# Altium PCB pcb.PcbDoc
Units mm, origin at the board's own origin, x right, y up, seen from the top; angles counter-clockwise.
Board outline 141 x 95 mm, 2 copper layers (Top Layer, Bottom Layer), stack 1.571 mm thick; 95 components, 65 nets, 236 pads, 0 vias.
Unrouted connection lines stored in the file: 165.
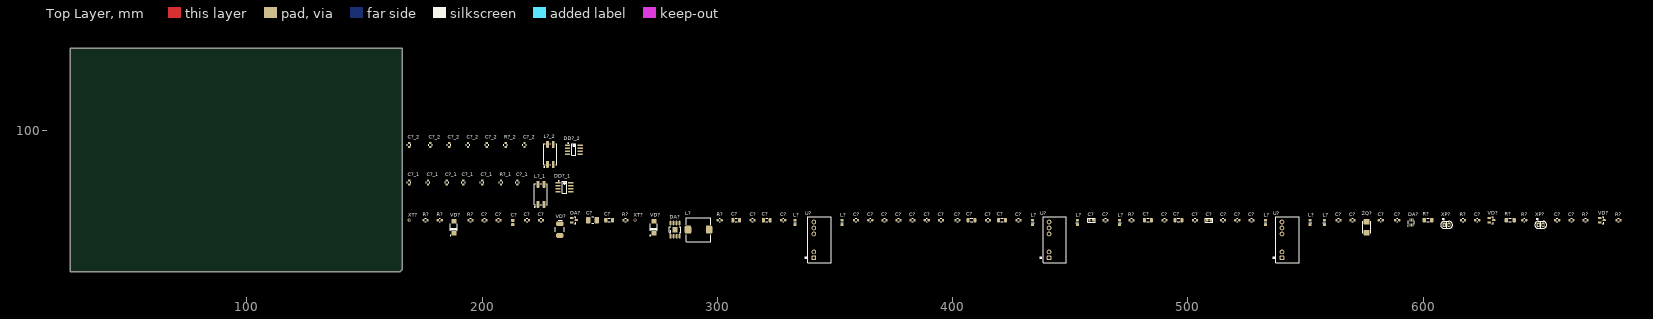
[diagram p0: Top Layer view]
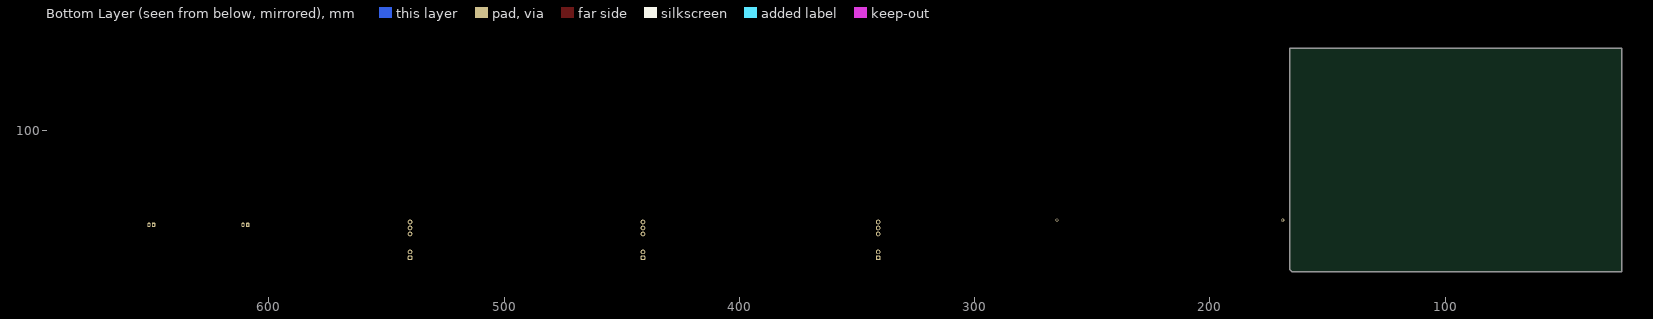
[diagram p1: Bottom Layer view, seen from below]

## Layer stack, top to bottom
Top Solder: solder mask 0.0102, Solder Resist, Dk 3.5
Top Layer: signal copper 0.0356
Dielectric1: core 1.5, FR-4, Dk 4.8
Bottom Layer: signal copper 0.0356
Bottom Solder: solder mask 0.0102, Solder Resist, Dk 3.5

## Board outline
25,135 25,40 165,40 166,41 166,135

## Design rules (kind name [scope] priority, off if disabled: settings)
Clearance [All] p1: gap=0.3 ignorepadtopadclearanceinfootprint=FALSE
ComponentClearance [All] p1: gap=-0.5 collisioncheckmode=3 verticalgap=-0.5 showdistances=FALSE
HoleSize [All] p1: absolutevalues=TRUE maxlimit=5 minlimit=0.025 maxpercent=80.000 minpercent=20.000
HoleToHoleClearance [All] p1: gap=0.3 allowstackedmicrovias=TRUE
PolygonConnect [All] p1: connectstyle=Relief reliefconductorwidth=0.3 reliefentries=4 polygonreliefangle="90 Angle" airgapwidth=0.3
RoomDefinition List1 [InComponentClass('List1')] p1: confinementstyle=ConfineIn formatcopy=TRUE lockcomponents=FALSE outline 168,43 686,43 686,67 168,67
RoomDefinition 2 [InComponentClass('2')] p2: confinementstyle=ConfineIn formatcopy=TRUE lockcomponents=FALSE outline 167,84 244,84 244,99 167,99
RoomDefinition 1 [InComponentClass('1')] p3: confinementstyle=ConfineIn formatcopy=TRUE lockcomponents=FALSE outline 167,67 240,67 240,83 167,83
RoutingCorners [All] p1: cornerstyle=45-Degree minsetback=2.5 maxsetback=2.5
RoutingVias [All] p1: holewidth=0.5 width=1 viastyle="Through Hole" minholewidth=0.5 minwidth=1 maxholewidth=0.8 maxwidth=1.3
SilkToSolderMaskClearance SilkscreenOverComponentPads [IsPad] p1: minsilkscreentomaskgap=0.254 clearancetoexposedcopper=TRUE
SolderMaskExpansion [All] p1: expansion=0.102
Width [All] p1: maxlimit=1 minlimit=0.3 preferedwidth=0.5
25 further rules are at their usual default settings.

## Classes and differential pairs
channel class List2: 1 2
component class List1: C? DA? DD? L? R? U? VD? XP? XT? ZQ?
component class 2: C?_2 DD?_2 L?_2 R?_2 VD?_2
component class 1: C?_1 DD?_1 L?_1 R?_1

## Components (designator, comment, footprint, x,y, rotation, side; value= is the part's Value field where it differs from the comment)
C? "20" CAPC1608N_SL 582,62 r0 top
C? "20" CAPC1608N_SL 570,62 r0 top
C? "0,1мк" CAPC1608N_SL 564,62 r0 top
C? "0,1мк" CAPC1608N_SL 521,62 r0 top
C? "1мк" CAPC1608N_SL 527,62 r0 top
C? "4,7мк" CAPC1608N_SL 402,62 r0 top
C? "0,1мк" CAPC1608N_SL 359,62 r0 top
C? "0,1мк" CAPC1608N_SL 365,62 r0 top
C? "0,1мк" CAPC1608N_SL 371,62 r0 top
C? "0,1мк" CAPC1608N_SL 377,62 r0 top
C? "0,1мк" CAPC1608N_SL 383,62 r0 top
C? "0,1мк" CAPC1608N_SL 389,62 r0 top
C? "0,1мк" CAPC1608N_SL 395,62 r0 top
C? "2,2мк" CAPC1608N 509,62 r0 top
C? "2,2мк" CAPC1608N 459,62 r0 top
C? "0,1мк" CAPC1608N_SL 465,62 r0 top
C? "0,1мк" CAPC1608N_SL 515,62 r0 top
C? "2,2мк" CAPC3216N 254,62 r0 top
C? "0,01мк" CAPC1608N_SL 207,62 r0 top
C? "68" CAPC1608N_SL 201,62 r0 top
C? "47мк" CAPC3225N 247,62 r0 top
C? "2,2мк" CAPC3216N 308,62 r0 top
C? "2,2мк" CAPC3216N 321,62 r0 top
C? "0,1мк" CAPC1608N_SL 315,62 r0 top
C? "0,1мк" CAPC1608N_SL 328,62 r0 top
C? "2,2мк" CAPC3216N 408,62 r0 top
C? "2,2мк" CAPC3216N 421,62 r0 top
C? "0,1мк" CAPC1608N_SL 415,62 r0 top
C? "0,1мк" CAPC1608N_SL 428,62 r0 top
C? "2,2мк" CAPC3216N 483,62 r0 top
C? "2,2мк" CAPC3216N 496,62 r0 top
C? "0,1мк" CAPC1608N_SL 490,62 r0 top
C? "0,1мк" CAPC1608N_SL 503,62 r0 top
C? "0,1мк" CAPC1608N_SL 663,62 r0 top
C? "0,1мк" CAPC1608N_SL 657,62 r0 top
C? "0,1мк" CAPC1608N_SL 623,62 r0 top
C? "0,1мк" CAPC1608N_SL 589,62 r0 top
C? "0,1мк" CAPC1608N_sl 225,62 r0 top
C? "0,1мк" CAPC1608N_sl 219,62 r0 top
C? "10мк" CAPC2012N 213,61 r90 top
C?_1 "0,1мк" CAPC1608N_SL 169,78 r90 top (schematic designator C?)
C?_1 "1000" CAPC1608N_SL 177,78 r90 top (schematic designator C?)
C?_1 "1000" CAPC1608N_SL 185,78 r90 top (schematic designator C?)
C?_1 "1000" CAPC1608N_SL 192,78 r90 top (schematic designator C?)
C?_1 "1000" CAPC1608N_SL 200,78 r90 top (schematic designator C?)
C?_1 "0,1мк" CAPC1608N_SL 215,78 r90 top (schematic designator C?)
C?_2 "0,1мк" CAPC1608N_SL 169,94 r90 top (schematic designator C?)
C?_2 "1000" CAPC1608N_SL 178,94 r90 top (schematic designator C?)
C?_2 "1000" CAPC1608N_SL 186,94 r90 top (schematic designator C?)
C?_2 "1000" CAPC1608N_SL 194,94 r90 top (schematic designator C?)
C?_2 "1000" CAPC1608N_SL 202,94 r90 top (schematic designator C?)
C?_2 "0,1мк" CAPC1608N_SL 218,94 r90 top (schematic designator C?)
DA? "L5973ADTR" SOIC8(with_termopad) 282,58 r0 top
DA? "DRTR5V0U4S" SOT363 595,61 r0 top
DA? "MCP1754ST-3302E/CB" SOT23-3N 239,62 r0 top
DD?_1 "ATA6560-GAQW-N" SOIC-8N 235,76 r0 top (schematic designator DD?)
DD?_2 "ATA6560-GAQW-N" SOIC-8N 239,92 r0 top (schematic designator DD?)
L? "220" L2012N 558,61 r90 top
L? "220" L2012N 471,61 r90 top
L? "68мк" CDRH104R 292,58 r0 top
L? "220" L2012N 333,61 r90 top
L? "220" L2012N 353,61 r90 top
L? "220" L2012N 434,61 r90 top
L? "220" L2012N 453,61 r90 top
L? "220" L2012N 533,61 r90 top
L? "220" L2012N 552,61 r90 top
L?_1 "Value" DR331 225,73 r90 top (schematic designator L?)
L?_2 "Value" DR331 229,90 r90 top (schematic designator L?)
R? "10к" RESC1608N_SL 476,62 r0 top
R? "8,2к" RESC1608N_SL 182,62 r0 top
R? "2,2к  1%" RESC1608N_SL 195,62 r0 top value=2,2к
R? "6,8к  1%" RESC1608N_SL 261,62 r0 top value=6,8к
R? "0" RESC1608N_SL 301,62 r0 top
R? "0" RESC1608N_SL 176,62 r0 top
R? "10" RESC1608N_SL 683,62 r0 top
R? "10" RESC1608N_SL 669,62 r0 top
R? "10" RESC1608N_SL 643,62 r0 top
R? "10" RESC1608N_SL 617,62 r0 top
R? "120" RESC3216N 637,62 r0 top
R? "120" RESC3216N 602,62 r0 top
R?_1 "10к" RESC1608N_SL 208,78 r90 top (schematic designator R?)
R?_2 "10к" RESC1608N_SL 210,94 r90 top (schematic designator R?)
U? "MEJ1S1205SC" MEJ1S1205SC 341,46 r90 top
U? "MEJ1S1205SC" MEJ1S1205SC 441,46 r90 top
U? "MEJ1S1205SC" MEJ1S1205SC 540,46 r90 top
VD? "SMBJ30A-TR" DO-214AA(SMB) 233,58 r90 top
VD? "SM712.TCT" SOT23-3N 676,62 r0 top
VD? "SM712.TCT" SOT23-3N 629,62 r0 top
VD? "PMEG4030EP" SOD128 188,59 r90 top
VD? "PMEG4030EP" SOD128 273,59 r90 top
XP? "PLS2-2" PLS2-2 650,60 r0 top
XP? "PLS2-2" PLS2-2 610,60 r0 top
XT? "PAD" Pad_1.3X0.8 265,62 r90 top value=PAD1.3x0.8
XT? "PAD" Pad_1.3X0.8 169,62 r90 top value=PAD1.3x0.8
ZQ? "ABM3-8.000MHZ-D2Y-T" ABM3 576,59 r90 top

## Footprints (in the part's own frame and the unit in brackets; to place one, negate y for a bottom-side part, rotate by r counter-clockwise, add the part's x,y. Pads: shape width x height; smd on the part's side, far side on the other; paste and mask are expansions set on the pad)
ABM3 [mm] "MINIATURE CERAMIC SMD CRYSTAL 5x3.2 mm"
  rrect30% 2.5x2.5 smd: 1(-2.35,0) 2(2.35,0)
  silkscreen extent -2.5,-1.75 2.5,1.75, body extent -4.25,-2.25 4.25,2.25, height 1.3
CAPC1608N [mm] "Chip Capacitor, Body 1.6x0.8mm, IPC Medium Density"
  rrect50% 1x1 smd: 1(-0.8,0) 2(0.8,0)
  silkscreen extent -1.65,-0.85 1.65,0.85, body extent -0.8,-0.41 0.8,0.41, height 0.53
CAPC1608N_SL [mm] "Chip Resistor, Body 1.6x0.8mm, IPC Medium Density"
  rrect50% 0.9x1 smd: 1(-0.85,0) 2(0.85,0)
  silkscreen extent -0.3,-0.75 0.3,0.75, body extent -0.8,-0.4 0.8,0.4, height 0.48
CAPC1608N_sl [mm] "Chip Resistor, Body 1.6x0.8mm, IPC Medium Density"
  rrect50% 0.9x1 smd: 1(-0.85,0) 2(0.85,0)
  silkscreen extent -0.3,-0.75 0.3,0.75, body extent -0.8,-0.4 0.8,0.4, height 0.48
CAPC2012N [mm] "Chip Capacitor, Body 2.0x1.3mm, IPC Medium Density"
  rrect50% 1.25x1.5 smd: 1(-0.925,0) 2(0.925,0)
  body extent -1,-0.6 1,0.6, height 0.43
CAPC3216N [mm] "Chip Capasitor, 2-Leads, Body 3,2x1,6mm, IPC Medium Density"
  rrect50% 1.3x1.8 smd: 1(-1.45,0) 2(1.45,0)
  silkscreen extent -0.51,-0.76 0.51,0.76, body extent -1.6,-0.8 1.6,0.8, height 0.53
CAPC3225N [mm] "Chip Capacitor, Body 3.2x2.5mm, IPC Medium Density"
  rrect50% 2x2.7 smd: 1(-1.9,0) 2(1.75,0)
  silkscreen extent -0.5,-1.4 0.4,1.4, body extent -1.6,-1.25 1.6,1.25, height 1.3
CDRH104R [mm]
  rrect50% 2.8x3.5 smd: 1(-4.5,0) 2(4.5,0)
  silkscreen extent -5.25,-5.13 5.25,5.13, body extent -5.25,-5.15 5.25,5.15, height 4
DO-214AA(SMB) [mm]
  rrect50% 2x3 smd: 1(2.5,0) 2(-2.5,0)
  silkscreen extent -1,-1.85 4,1.85, body extent -2.65,-1.85 2.65,1.85, height 2.3
DR331 [mm]
  rrect50% 3x1.2 smd: 1(-4.25,1.25) 2(-4.25,-1.25) 3(4.25,-1.25) 4(4.25,1.25)
  silkscreen extent -5.75,-2.75 4.5,3, body extent -4.5,-2.7 4.5,2.7, height 5.01
L2012N [mm] "Chip Ferrite Bead SMD0805, Body 2.0x1.3mm, IPC Medium Density"
  rrect40% 1x1.25 smd: 1(-1,0)
  rrect50% 1x1.25 smd: 2(1,0)
  silkscreen extent 0,-0.6 0,0.6, body extent -1,-0.6 1,0.6, height 0.43
MEJ1S1205SC [mm]
  rrect50% 2x2 hole 1.2: 1(0,0)
  round 2 hole 1.2 unplated: 2(2.54,0) 5(10.16,0) 6(12.7,0) 7(15.24,0)
  silkscreen extent -2.13,-7.33 17.37,4, body extent -2.13,-7.28 17.37,2.54, height 12.51
Pad_1.3X0.8 [mm]
  round 1.3 hole 0.8: 1(0,0)
PLS2-2 [mm]
  rrect50% 1.4x2 hole 0.8: 1(-1,0)
  oval 1.4x2 hole 0.8: 2(1,0)
  silkscreen extent -2.5,-1.5 2.5,3, body extent -2,-1 2,1, height 6
RESC1608N_SL [mm] "Chip Resistor, Body 1.6x0.8mm, IPC Medium Density"
  rrect50% 0.9x1 smd: 1(-0.85,0) 2(0.85,0)
  silkscreen extent -0.3,-0.75 0.3,0.75, body extent -0.8,-0.4 0.8,0.4, height 0.48
RESC3216N [mm] "Chip Resistor, 2-Leads, Body 3,2x1,6mm, IPC Medium Density"
  rrect50% 1.5x1.8 smd: 1(-1.6,0) 2(1.7,0)
  Top Layer pour cut-out: -0.6,0.9 -0.6,-0.9 0.6,-0.9 0.6,0.9
  silkscreen extent -0.51,-0.76 0.51,0.76, body extent -1.6,-0.8 1.6,0.8, height 0.53
SOD128 [mm] "SODFL, 2-Leads, Body 2,50x4,70mm, IPC Low Density"
  rrect30% 2x2.2 smd: 1(-2.5,0) 2(2.5,0)
  silkscreen extent -3.65,-1.5 1.5,1.65, body extent -2.85,-1.25 2.35,1.45, height 1.1
SOIC8(with_termopad) [mm]
  rect 0.7x2 smd: 1(-1.905,-2.8)
  oval 0.7x2 smd: 2(-0.635,-2.8) 3(0.635,-2.8) 4(1.905,-2.8) 5(1.905,2.8) 6(0.635,2.8) 7(-0.635,2.8) 8(-1.905,2.8)
  rect 2.3x2.3 smd: 7(0,0)
  silkscreen extent -2.5,-1.25 2.5,1.25, body extent -2.45,-3 2.45,3, height 1.75
SOIC-8N [mm] "SOIC, 8-Leads, Body 4.9x3.9mm, Pitch 1.27mm, IPC Medium Density"
  rrect50% 2.2x0.6 smd: 1(-2.7,1.905) 2(-2.7,0.635) 3(-2.7,-0.635) 4(-2.7,-1.905) 5(2.7,-1.905) 6(2.7,-0.635) 7(2.7,0.635) 8(2.7,1.905)
  silkscreen extent -2.52,-2.5 0.9,2.88, body extent -3,-2.54 3,2.54, height 1.75
SOT23-3N [mm] "SOT23, 3-Leads, Body 2.9x1.3mm, Pitch 0.95mm, Lead Span 2.5mm, IPC Medium Density"
  rrect50% 1.5x0.8 smd: 1(-0.875,0.95) 2(-0.875,-0.95) 3(1,0)
  rrect50% 1.3x0.8 on Mech16: p(-0.875,-0.95) p(-0.875,0.95) p(1,0)
  silkscreen extent 0.2,-1.5 0.75,1.5, body extent -1.2,-1.5 1.3,1.5, height 1.12
SOT363 [mm] "SOT-353/SC-88A; 5 Leads; Body 2.2 x 2.2 mm, inc. leads (LxW max)"
  rrect50% 0.35x1.35 smd: 1(-0.65,-1.075) 2(0,-1.075) 3(0.65,-1.075) 4(0.65,1.075) 5(0,1.075) 6(-0.65,1.075)
  silkscreen extent -1.55,-1.55 1.23,0.7, body extent -1.07,-1.1 1.08,1.1, height 1.05

## Part data
C? C?: library part CC0603JRNPO9BN200_Yageo, "CAP CER 20PF 50V 5% NPO 0603", Manufacturer=Yageo, ManufacturerPartNumber=CC0603JRNPO9BN200, Operating Temperature="-55°C ~ +125°C", Tolerance="± 5 %", ValueBOM="Конденсатор CC0603JRNPO9BN200 \"Yageo\" (20 пФ ± 10 %, 50 В,NP0, SMD 0603)", Voltage="50 В", ComponentLink2Description="Manufacturer Link", ComponentLink2URL=http://www.yageo.com/, ComponentLink3Description=Datasheet, ComponentLink3URL=http://www.yageo.com/documents/recent/UPY-GPHC_X7R_6.3V-to-50V-v12.pdf, Modify=12.08.2015, PartNumber=CC0603JRNPO9BN200_Yageo, Sorting=20, Supplier=Digi-Key, Supplier P/N=311-1424-1-ND, TKE=NP0, Автор="Хоменко С.П.", Количество1=10, Количество2=25, Разрешен к применению=True, Цена1=0,031, Цена2=0,0216
C? C? C? C? C? C? C? C? C? C? C? C? C? C? C? C? C? C? C? C? C? C?_1 C?_2: library part CC0603KRX7R0BB104_Yageo, "0.1µF ±10% 100V Ceramic Capacitor X7R 0603 (1608 Metric)", Manufacturer=Yageo, ManufacturerPartNumber=CC0603KRX7R0BB104, Operating Temperature="-55°C ~ +125°C", Tolerance="± 10 %", ValueBOM="Конденсатор CC0603KRX7R0BB104 \"Yageo\" (0,1 мкФ ± 10 %, 100 В, X7R, SMD 0603)", Voltage="100 В", ComponentLink2Description="Manufacturer Link", ComponentLink2URL=http://www.yageo.com/, ComponentLink3Description=Datasheet, ComponentLink3URL=http://www.yageo.com/documents/recent/UPY-NP0X7R_MV_100-to-630V_18.pdf, Modify="27.02.2017 8:51:43", PartNumber=CC0603KRX7R0BB104_Yageo, Sorting=100000, Supplier=Digi-Key, Supplier P/N=311-1523-1-ND, TKE=X7R, Автор="Ткаченко М.", Количество1=1, Количество2=10, Разрешен к применению=True, Цена1=0,21, Цена2=0,14
C?: library part CC0603KRX7R7BB105_Yageo, "CAP CER 1UF 16V 10% X7R 0603", Manufacturer=Yageo, ManufacturerPartNumber=CC0603KRX7R7BB105, Operating Temperature="-55°C ~ +125°C", Tolerance="± 10 %", ValueBOM="Конденсатор CC0603KRX7R7BB105 \"Yageo\" (1 мкФ ± 10 %, 16 В,X7R, SMD 0603)", Voltage="16 В", ComponentLink2Description="Manufacturer Link", ComponentLink2URL=http://www.yageo.com/, ComponentLink3Description=Datasheet, ComponentLink3URL=http://www.yageo.com/documents/recent/UPY-GPHC_X7R_6.3V-to-50V-v12.pdf, Modify="12.08.2015 16:30:29", PartNumber=CC0603KRX7R7BB105_Yageo, Sorting=1000000, Supplier=Digi-Key, Supplier P/N=311-1446-1-ND, TKE=X7R, Автор="Хоменко С.П.", Количество1=10, Количество2=25, Разрешен к применению=True, Цена1=0,44, Цена2=0,031
C?: library part CC0603KRX5R6BB475_Yageo, "CAP CER 4.7UF 10V 10% X5R 0603", Manufacturer=Yageo, ManufacturerPartNumber=CC0603KRX5R6BB475, Operating Temperature="-55°C ~ +125°C", Tolerance="± 10 %", ValueBOM="Конденсатор CC0603KRX5R6BB475 \"Yageo\" (4,7 мкФ ± 10 %, 10 В, X5R, SMD 0603)", Voltage="10 В", ComponentLink2Description="Manufacturer Link", ComponentLink2URL=http://www.yageo.com/, ComponentLink3Description=Datasheet, ComponentLink3URL=http://www.yageo.com/documents/recent/UPY-GPHC_X5R_4V-to-50V_19.pdf, Modify="12.08.2015 16:02:03", PartNumber=CC0603KRX5R6BB475_Yageo, Sorting=4700000, Supplier=Digi-Key, Supplier P/N=311-1455-1-ND, TKE=X5R, Автор="Хоменко С.П.", Количество1=1, Количество2=10, Разрешен к применению=False, Цена1=0,14, Цена2=0,095
C? C?: library part "GRM188R71A225KE15D_Murata Electronics", "CAP CER 2.2UF 10V X7R 0603", Manufacturer="Murata Electronics", ManufacturerPartNumber=GRM188R71A225KE15D, Operating Temperature="-55°C ~ +125°C", Tolerance="± 10 %", ValueBOM="Конденсатор GRM188R71A225KE15D \"Murata Electronics\" (2,2 мкФ ± 10 %, 10 В, X7R, SMD 0603)", Voltage="10 В", ComponentLink2Description="Manufacturer Link", ComponentLink2URL=http://www.murata.com/, ComponentLink3Description=Datasheet, ComponentLink3URL=http://www.murata.com/~/media/webrenewal/support/library/catalog/products/capacitor/mlcc/c02e.pdf, Modify="29.03.2016 8:54:49", PartNumber="GRM188R71A225KE15D_Murata Electronics", Sorting=2200000, Supplier=Digi-Key, Supplier P/N=490-4520-1-ND, TKE=X7R, Автор="Хоменко С.П.", Количество1=1, Количество2=10, Разрешен к применению=False, Цена1=0,34, Цена2=0,28
C? C? C? C? C? C? C?: library part CC1206KKX7R9BB225_Yageo, "CAP CER 2.2UF 50V 10% X7R 1206", Manufacturer=Yageo, ManufacturerPartNumber=CC1206KKX7R9BB225, Operating Temperature="-55°C ~ +125°C", Package Description="Chip Capasitor, 2-Leads, Body 3,2x1,6mm, IPC Medium Density", Tolerance="± 10 %", ValueBOM="Конденсатор CC1206KKX7R9BB225 \"Yageo\" (2,2 мкФ ± 10 %, 50 В, X7R, SMD 1206)", Voltage="50 В", ComponentLink2Description="Manufacturer Link", ComponentLink2URL=http://www.yageo.com/, ComponentLink3Description=Datasheet, ComponentLink3URL=http://www.yageo.com/documents/recent/UPY-GPHC_X7R_6.3V-to-50V-v12.pdf, Modify=13.08.2015, PartNumber=CC1206KKX7R9BB225_Yageo, Sorting=2200000, Supplier=Digi-Key, Supplier P/N=311-1964-1-ND, TKE=X7R, Автор="Хоменко С.П.", Количество1=10, Количество2=25, Разрешен к применению=True, Цена1=0,292, Цена2=0,201
C?: library part CC0603KPX7R9BB103_Yageo, "CAP CER 10000PF 50V 10% X7R 0603", Manufacturer=Yageo, ManufacturerPartNumber=CC0603KPX7R9BB103, Operating Temperature="-55°C ~ +125°C", Tolerance="± 10 %", ValueBOM="Конденсатор CC0603KPX7R9BB103 \"Yageo\" (0,01 мкФ ± 10 %, 50 В,X7R, SMD 0603)", Voltage="50 В", ComponentLink2Description="Manufacturer Link", ComponentLink2URL=http://www.yageo.com/, ComponentLink3Description=Datasheet, ComponentLink3URL=http://www.yageo.com/documents/recent/UPY-GPHC_X7R_6.3V-to-50V-v12.pdf, Modify=06.07.2015, PartNumber=CC0603KPX7R9BB103_Yageo, Sorting=10000, Supplier=Digi-Key, Supplier P/N=311-1572-1-ND, TKE=X7R, Автор="Хоменко С.П.", Количество1=10, Количество2=100, Разрешен к применению=True, Цена1=0,019, Цена2=0,0089
C?: library part CC0603JRNPO9BN680_Yageo, "CAP CER 68PF 50V NPO 0603", Manufacturer=Yageo, ManufacturerPartNumber=CC0603JRNPO9BN680, Operating Temperature="-55°C ~ +125°C", Tolerance="± 5 %", ValueBOM="Конденсатор CC0603JRNPO9BN680 \"Yageo\" (68 пФ ± 5 %, 50 В, NP0, SMD 0603)", Voltage="50 В", ComponentLink2Description="Manufacturer Link", ComponentLink2URL=http://www.yageo.com/, ComponentLink3Description=Datasheet, ComponentLink3URL=http://www.yageo.com/documents/recent/UPY-GP_NP0_16V-to-50V_10.pdf, Modify=22.01.2016, PartNumber=CC0603JRNPO9BN680_Yageo, Sorting=68, Supplier=Digi-Key, TKE=NP0, Автор="Хоменко С.П.", Количество1=10, Количество2=25, Разрешен к применению=True, Цена1=0,029, Цена2=0,0204
C?: library part "GRM32ER71A476KE15L_Murata Electronics", "47µF ±10% 10V Ceramic Capacitor X7R 1210 (3225 Metric)", Manufacturer="Murata Electronics", ManufacturerPartNumber=GRM32ER71A476KE15L, Operating Temperature="-55°C ~ +125°C", Package Description="Конденсатор керамический тип-размер 1210(3225)", Tolerance="± 20 %", ValueBOM="Конденсатор GRM32ER71A476KE15L \"Murata Electronics\" (47 мкФ ± 20 %, 10 В, X7R, SMD 1210)", Voltage="10 В", ComponentLink2Description="Manufacturer Link", ComponentLink2URL=http://www.murata.com/, ComponentLink3Description=Datasheet, ComponentLink3URL=http://www.murata.com/~/media/webrenewal/support/library/catalog/products/capacitor/mlcc/c02e.ashx, Modify=20.03.2017, PartNumber="GRM32ER71A476KE15L_Murata Electronics", Sorting=47000000, Supplier=Digi-Key, Supplier P/N=490-5312-1-ND, TKE=X7R, Автор="Хоменко С.П.", Количество1=10, Количество2=250, Разрешен к применению=True, Цена1=0,767, Цена2=0,51108
C? C? C?_1 C?_2: library part CC0603KRX7R9BB104_Yageo, "CAP CER 0.1UF 50V 10% X7R 0603", Manufacturer=Yageo, ManufacturerPartNumber=CC0603KRX7R9BB104, Operating Temperature="-55°C ~ +125°C", Tolerance="± 10 %", ValueBOM="Конденсатор CC0603KRX7R9BB104 \"Yageo\" (0,1 мкФ ± 10 %, 50 В,X7R, SMD 0603)", Voltage="50 В", ComponentLink2Description="Manufacturer Link", ComponentLink2URL=http://www.yageo.com/, ComponentLink3Description=Datasheet, ComponentLink3URL=http://www.yageo.com/documents/recent/UPY-GPHC_X7R_6.3V-to-50V-v12.pdf, Modify=06.07.2015, PartNumber=CC0603KRX7R9BB104_Yageo, Sorting=100000, Supplier=Digi-Key, Supplier P/N=311-1344-1-ND, TKE=X7R, Автор="Хоменко С.П.", Количество1=10, Количество2=100, Разрешен к применению=True, Цена1=0,027, Цена2=0,0125
C?: library part CC0805KKX5R7BB106_Yageo, "CAP CER 10UF 16V 10% X5R 0805", Manufacturer=Yageo, ManufacturerPartNumber=CC0805KKX5R7BB106, Operating Temperature="-55°C ~ +125°C", Tolerance="± 10 %", ValueBOM="Конденсатор CC0805KKX5R7BB106 \"Yageo\" (10 мкФ ± 10 %, 16 В, X5R, SMD 0805)", Voltage="16 В", ComponentLink2Description="Manufacturer Link", ComponentLink2URL=http://www.yageo.com/, ComponentLink3Description=Datasheet, ComponentLink3URL=http://www.yageo.com/documents/recent/UPY-GPHC_X7R_6.3V-to-50V-v12.pdf, Modify=14.08.2015, PartNumber=CC0805KKX5R7BB106_Yageo, Sorting=10000000, Supplier=Digi-Key, Supplier P/N=311-1865-1-ND, TKE=X5R, Автор="Хоменко С.П.", Количество1=10, Количество2=100, Разрешен к применению=True, Цена1=0,134, Цена2=0,06810
C?_1 C?_1 C?_1 C?_1 C?_2 C?_2 C?_2 C?_2: library part GCM1885C1H102JA16D, "CAP CER 1000PF 50V NP0 0603", Supplier Part Number 1=490-4768-1-ND, ValueBOM="Конденсатор GCM1885C1H102JA16D \"Murata\" (1000 пФ± 10 %, 50 В, C0G, SMD 0603)", Supplier 1=Digi-Key
DA?: library part L5973ADTR_STMicroelectronics, "IC REG BUCK ADJ 2A 8SOIC", Current="2 A", Manufacturer=STMicroelectronics, Operating Temperature="-40°C ~ +150°C", Package=SOIC8(with_termopad), Package Description="Корпус SOIC8 с термоплощадкой", ValueBOM="Микросхема  L5973ADTR \"STMicroelectronics\"", Voltage="4 В -36 В", ComponentLink2Description="Manufacturer Link", ComponentLink2URL=http://www.st.com, ComponentLink3Description=Datasheet, ComponentLink3URL=https://www.st.com/content/ccc/resource/technical/document/datasheet/cb/fb/4a/2d/ed/b0/40/06/CD00003370.pdf/files/CD00003370.pdf/jcr:content/translations/en.CD00003370.pdf, Expr1007="4 В -36 В", Expr1008="2 A", ManufacturerPartNumber=L5973ADTR, Modify="15.03.2019 16:28:28", PartNumber=L5973ADTR_STMicroelectronics, SMD mounting=True, Supplier=Digi-Key, Supplier P/N=497-5328-1-ND, Автор="Ткаченко М.", Количество1=1, Количество2=10, Разрешен к применению=True, Цена1=2,64, Цена2=2,4
DA?: library part "DRTR5V0U4S_Diodes Incorporated", "TVS DIODE 5.5VWM SOT363", Manufacturer="Diodes Incorporated", Operating Temperature="-65°C ~ +150°С", ValueBOM="Микросхема DRTR5V0U4S Diodes Incorporated", Voltage="5 В", ComponentLink2Description="Manufacturer Link", ComponentLink2URL=http://www.diodes.com/, ComponentLink3Description=Datasheet, ComponentLink3URL=http://www.diodes.com/_files/datasheets/DRTR5V0U4S.pdf, ManufacturerPartNumber=DRTR5V0U4S, Marking=TG1, Modify="29.08.2016 14:27:04", PartNumber="DRTR5V0U4S_Diodes Incorporated", Supplier=Digi-Key, Supplier P/N=DRTR5V0U4S-7DICT-ND, Автор="Ткаченко М.", Количество1=1, Количество2=10, Разрешен к применению=True, Цена1=0,4, Цена2=0,32
DA?: library part "MCP1754ST-3302E/CB_Microchip Technology", "IC REG LDO 3.3V 0.15A SOT23A-3", Manufacturer="Microchip Technology", Operating Temperature="-40°C ~ +125°C", Package Description="SOT23, 3-Leads, Body 2.9x1.3mm, Pitch 0.95mm, Lead Span 2.5mm, IPC Medium Density", ValueBOM="Микросхема  MCP1754ST-3302E/CB \"Microchip Technology\" SOT23-3", ComponentLink2Description="Manufacturer Link", ComponentLink2URL=http://www.microchip.com/, ComponentLink3Description=Datasheet, ComponentLink3URL=http://ww1.microchip.com/downloads/en/DeviceDoc/20002276C.pdf, ManufacturerPartNumber=MCP1754ST-3302E/CB, Marking=JD, Modify="11.08.2015 17:28:07", PartNumber="MCP1754ST-3302E/CB_Microchip Technology", Supplier=Digi-Key, Supplier P/N=MCP1754ST-3302E/CBCT-ND, Автор="Хоменко С.П.", Количество1=1, Количество2=10, Разрешен к применению=True, Цена1=0,48, Цена2=0,4
DD?_1 DD?_2: library part "ATA6560-GAQW-N_Microchip Technology", "INDUSTRIAL GRADE CAN TRX WITH NS", Manufacturer="Microchip Technology", Operating Temperature="-40°C ~ +85°C", Package Description="Leads, Body 4.9x3.9mm, Pitch 1.27mm, IPC Medium Density", ValueBOM="Микросхема  ATA6560-GAQW-N \"Microchip Technology\" SOIC-8", ComponentLink2Description="Manufacturer Link", ComponentLink2URL=http://www.microchip.com/, ComponentLink3Description=Datasheet, ComponentLink3URL=http://ww1.microchip.com/downloads/en/DeviceDoc/ATA6560-ATA6561-High-Speed-CAN-Transceiver-DS20005991A.pdf, ManufacturerPartNumber=ATA6560-GAQW-N, Modify="15.03.2019 19:43:22", PartNumber="ATA6560-GAQW-N_Microchip Technology", Supplier=Digi-Key, Supplier P/N=ATA6560-GAQW-NCT-ND, Автор="Ткаченко М.", Количество1=1, Количество2=25, Разрешен к применению=True, Цена1=0,55, Цена2=0,45
L? L? L? L? L? L? L? L?: library part "BLM21PG221SN1D_Murata Electronics", "FERRITE BEAD 220 OHM 0805 2A", Manufacturer="Murata Electronics", ManufacturerPartNumber=BLM21PG221SN1D, Operating Temperature="-55°C ~ +125°C", Package Description="Chip Ferrite Bead SMD0805, Body 2.0x1.3mm, IPC Medium Density", Tolerance="± 25 %", ValueBOM="Индуктивность BLM21PG221SN1D \"Murata Electronics\" (220Гн, ± 25 %, SMD 0805)", ComponentLink2Description="Manufacturer Link", ComponentLink2URL=http://www.murata.com/, ComponentLink3Description=Datasheet, ComponentLink3URL=http://search.murata.co.jp/Ceramy/image/img/PDF/ENG/L0110S0100BLM21P.pdf, Modify=02.02.2016, PartNumber="BLM21PG221SN1D_Murata Electronics", Sorting=2, Supplier=Digi-Key, Supplier P/N=490-1054-1-ND, Автор="Хоменко С.П.", Количество1=10, Количество2=50, Разрешен к применению=True, Цена1=0,09, Цена2=0,0732
L?: library part CDRH104RNP-680NC_Sumida, "FIXED IND 68UH 1.42A 213 MOHM", Manufacturer=Sumida, ManufacturerPartNumber=CDRH104RNP-680NC, Operating Temperature="-40°C ~ +105°C", Tolerance="± 30 %", ValueBOM="Индуктивность CDRH104RNP-680NC \"Sumida\" (68мкГн, ± 30 %)", ComponentLink2Description="Manufacturer Link", ComponentLink2URL=http://sumida.com/, ComponentLink3Description=Datasheet, ComponentLink3URL=http://products.sumida.com/products/pdf/CDRH104R.pdf, Marking=680, Modify="13.08.2015 11:56:48", PartNumber=CDRH104RNP-680NC_Sumida, Sorting=68, Supplier=Digi-Key, Supplier P/N=308-2170-1-ND, Автор="Хоменко С.П.", Количество1=10, Количество2=50, Разрешен к применению=True, Цена1=1,172, Цена2=0,161
L?_1 L?_2: library part "DR331-513AE_Bourns Inc.", "51µH @ 100kHz 2 Line Common Mode Choke Surface Mount 500mA DCR 300 mOhm, CAN", Manufacturer="Bourns Inc.", ManufacturerPartNumber=DR331-513AE, Operating Temperature="-40°C ~ +135°C", ValueBOM="Индуктивность DR331-513AE Bourns Inc.", ComponentLink2Description="Manufacturer Link", ComponentLink2URL=http://www.bourns.com, ComponentLink3Description=Datasheet, ComponentLink3URL=http://www.bourns.com/docs/Product-Datasheets/dr331.pdf, Marking=513A, Modify="24.03.2017 10:04:07", PartNumber="DR331-513AE_Bourns Inc.", Supplier=Digi-Key, Supplier P/N=DR331-513AECT-ND, Автор="Хоменко С.П.", Количество1=10, Количество2=250, Разрешен к применению=True, Цена1=0,786, Цена2=0,50804
R? R?_1 R?_2: library part RC0603JR-0710KL_Yageo, "RES SMD 10K OHM 5% 1/10W 0603", Manufacturer=Yageo, ManufacturerPartNumber=RC0603JR-0710KL, Operating Temperature="-55°C ~ +125°C", Package Description="Chip Resistor, Body 1.6x0.8mm, IPC Medium Density", Power="0,1 Вт", Tolerance="± 5 %", ValueBOM="Резистор RC0603JR-0710KL \"Yageo\" (10 кОм ± 5 %, 0,1 Вт SMD 0603)", ComponentLink2Description="Manufacturer Link", ComponentLink2URL=http://www.yageo.com/, ComponentLink3Description=Datasheet, ComponentLink3URL=http://www.yageo.com/NewPortal/yageodocoutput?fileName=/pdf/R-Chip/PYu-RC_Group_51_RoHS_L_3.pdf, Marking=103, Modify="12.08.2015 22:38:32", PartNumber=RC0603JR-0710KL_Yageo, Sorting=10000, Supplier=Digi-Key, Supplier P/N=311-10KGRCT-ND, Автор="Хоменко С.П.", Количество1=10, Количество2=25, Разрешен к применению=True, ТКС=±100ppm/C°, Цена1=0,011, Цена2=0,008
R?: library part RC0603JR-078K2L_Yageo, "RES SMD 8,2к  1% 1/10W 0603", Manufacturer=Yageo, ManufacturerPartNumber=RC0603JR-078K2L, Operating Temperature="-55°C ~ +155°C", Package Description="Chip Resistor, Body 1.6x0.8mm, IPC Medium Density", Power="0,1 Вт", Tolerance="± 5 %", ValueBOM="Резистор RC0603JR-078K2L \"Yageo\" (8,2 кОм ± 5 %, 0,1 Вт SMD 0603)", ComponentLink2Description="Manufacturer Link", ComponentLink2URL=http://www.yageo.com/, ComponentLink3Description=Datasheet, ComponentLink3URL=http://www.yageo.com/NewPortal/yageodocoutput?fileName=/pdf/R-Chip/PYu-RC_Group_51_RoHS_L_3.pdf, Marking=822, Modify=12.08.2015, PartNumber=RC0603JR-078K2L_Yageo, Sorting=8200, Supplier=Digi-Key, Supplier P/N=311-1.5KGRCT-ND, Автор="Хоменко С.П.", Количество1=10, Количество2=25, Разрешен к применению=True, ТКС=±100ppm/C°, Цена1=0,014, Цена2=0,01
R?: library part RC0603FR-072K2L_Yageo, "RES SMD 2,2к  1% 1/10W 0603", Manufacturer=Yageo, ManufacturerPartNumber=RC0603FR-072K2L, Operating Temperature="-55°C ~ +155°C", Package Description="Chip Resistor, Body 1.6x0.8mm, IPC Medium Density", Power="0,1 Вт", Tolerance="± 1 %", ValueBOM="Резистор RC0603FR-072K2L Yageo", ComponentLink2Description="Manufacturer Link", ComponentLink2URL=http://www.yageo.com/, ComponentLink3Description=Datasheet, ComponentLink3URL=http://www.yageo.com/NewPortal/yageodocoutput?fileName=/pdf/R-Chip/PYu-RC_Group_51_RoHS_L_3.pdf, Marking=2201, Modify=12.08.2015, PartNumber=RC0603FR-072K2L_Yageo, Sorting=2200, Supplier=Digi-Key, Supplier P/N=311-1.10KHRCT-ND, Автор="Хоменко С.П.", Количество1=10, Количество2=25, Разрешен к применению=True, ТКС=±100ppm/C°, Цена1=0,014, Цена2=0,01
R?: library part RC0603FR-076K8L_Yageo, "RES SMD 6,8к  1% 1/10W 0603", Manufacturer=Yageo, ManufacturerPartNumber=RC0603FR-076K8L, Operating Temperature="-55°C ~ +155°C", Package Description="Chip Resistor, Body 1.6x0.8mm, IPC Medium Density", Power="0,1 Вт", Tolerance="± 1 %", ValueBOM="Резистор RC0603FR-076K8L \"Yageo\" (6,8 кОм ± 1 %, 0,1 Вт SMD 0603)", ComponentLink2Description="Manufacturer Link", ComponentLink2URL=http://www.yageo.com/, ComponentLink3Description=Datasheet, ComponentLink3URL=http://www.yageo.com/NewPortal/yageodocoutput?fileName=/pdf/R-Chip/PYu-RC_Group_51_RoHS_L_3.pdf, Marking=6801, Modify=12.08.2015, PartNumber=RC0603FR-076K8L_Yageo, Sorting=6800, Supplier=Digi-Key, Автор="Хоменко С.П.", Количество1=10, Количество2=25, Разрешен к применению=True, ТКС=±100ppm/C°, Цена1=0,014, Цена2=0,01
R? R?: library part RC0603JR-070RL_Yageo, "RES SMD 0.0OHM JUMPER 1/10W 0603", Manufacturer=Yageo, ManufacturerPartNumber=RC0603JR-070RL, Operating Temperature="-55°C ~ +125°C", Package Description="Chip Resistor, Body 1.6x0.8mm, IPC Medium Density", Power="0,1 Вт", Tolerance="± 5 %", ValueBOM="Резистор RC0603JR-070RL \"Yageo\" (0 Ом ± 5 %, 0,1 Вт SMD 0603)", ComponentLink2Description="Manufacturer Link", ComponentLink2URL=http://www.yageo.com/, ComponentLink3Description=Datasheet, ComponentLink3URL=http://www.yageo.com/NewPortal/yageodocoutput?fileName=/pdf/R-Chip/PYu-RC_Group_51_RoHS_L_3.pdf, Marking=0, Modify=27.08.2015, PartNumber=RC0603JR-070RL_Yageo, Sorting=0, Supplier=Digi-Key, Supplier P/N=311-0.0GRCT-ND, Автор="Хоменко С.П.", Количество1=10, Количество2=25, Разрешен к применению=True, ТКС=±100ppm/C°, Цена1=0,011, Цена2=0,008
R? R? R? R?: library part RC0603JR-0710RL_Yageo, "RES SMD 10 OHM 5% 1/10W 0603", Manufacturer=Yageo, ManufacturerPartNumber=RC0603JR-0710RL, Operating Temperature="-55°C ~ +125°C", Package Description="Chip Resistor, Body 1.6x0.8mm, IPC Medium Density", Power="0,1 Вт", Tolerance="± 5 %", ValueBOM="Резистор RC0603JR-0710RL \"Yageo\" (10 Ом ± 5 %, 0,1 Вт SMD 0603)", ComponentLink2Description="Manufacturer Link", ComponentLink2URL=http://www.yageo.com/, ComponentLink3Description=Datasheet, ComponentLink3URL=http://www.yageo.com/NewPortal/yageodocoutput?fileName=/pdf/R-Chip/PYu-RC_Group_51_RoHS_L_3.pdf, Marking=100, Modify="12.08.2015 22:38:32", PartNumber=RC0603JR-0710RL_Yageo, Sorting=10, Supplier=Digi-Key, Supplier P/N=311-22GRCT-ND, Автор="Хоменко С.П.", Количество1=10, Количество2=25, Разрешен к применению=True, ТКС=±200ppm/C°, Цена1=0,011, Цена2=0,008
R? R?: library part RC1206JR-07120RL_Yageo, "120 Ohm ±5% 0.25W, 1/4W Chip Resistor 1206 (3216 Metric) Moisture Resistant Thick Film", Manufacturer=Yageo, ManufacturerPartNumber=RC1206JR-07120RL, Operating Temperature="-55°C ~ +155°C", Package Description="Chip Resistor, Body 3,2x1.6mm, IPC Medium Density", Power="0,25 Вт", Tolerance="± 5 %", ValueBOM="Резистор RC1206JR-07120RL \"Yageo\" (120 Ом ± 5 %, 0,25 Вт SMD 1206)", ComponentLink2Description="Manufacturer Link", ComponentLink2URL=http://www.yageo.com/, ComponentLink3Description=Datasheet, ComponentLink3URL=http://www.yageo.com.tw/exep/pages/download/literatures/PYu-R_INT-thick_7.pdf, Marking=121, Modify="01.03.2017 9:26:19", PartNumber=RC1206JR-07120RL_Yageo, Sorting=120, Supplier=Digi-Key, Supplier P/N=311-200ERCT-ND, Автор="Ткаченко М.", Количество1=1, Количество2=10, Разрешен к применению=True, ТКС=±200ppm/C°, Цена1=0,10, Цена2=0,22
U? U? U?: library part "MEJ1S1205SC_Murata Electronics", "DC DC CONVERTER 5V 1W", Current="0,2 A", Manufacturer="Murata Electronics", Operating Temperature="-40°C ~ +85°C", Tolerance="± 1 %", ValueBOM="DC-DC преобразователь MEJ1S1205SC \"Murata Electronics\"", Voltage="5,0 В", ComponentLink2Description="Manufacturer Link", ComponentLink2URL=http://www.murata.com/, ComponentLink3Description=Datasheet, ComponentLink3URL=https://power.murata.com/pub/data/power/ncl/kdc_mej1.pdf, ManufacturerPartNumber=MEJ1S1205SC, Modify="15.03.2019 15:17:48", PartNumber="MEJ1S1205SC_Murata Electronics", Supplier=Digi-Key, Supplier P/N=811-3013-5-ND, Автор="Ткаченко М.", Количество1=1, Количество2=10, Разрешен к применению=True, Цена1=8,91, Цена2=8,81
VD?: library part SMBJ30A-TR_STMicroelectronics, "TVS DIODE 30VWM 64.3VC SMB", Manufacturer=STMicroelectronics, Operating Temperature="-55°C ~ +150°C", Package Description="Корпус DO-214AA", ValueBOM="TVS диод SMBJ30A-TR \"STMicroelectronics\"", ComponentLink2Description="Manufacturer Link", ComponentLink2URL=http://www.st.com, ComponentLink3Description=Datasheet, ComponentLink3URL=http://www.st.com/web/en/resource/technical/document/datasheet/CD00001366.pdf, ManufacturerPartNumber=SMBJ30A-TR, Marking=BUM, Modify="14.08.2015 15:52:42", PartNumber=SMBJ30A-TR_STMicroelectronics, Supplier=Digi-Key, Supplier P/N=497-7452-1-ND, Автор="Хоменко С.П.", Количество1=10, Количество2=100, Разрешен к применению=True, Цена1=0,162, Цена2=0,107
VD? VD?: library part "SM712.TCT_Semtech Corporation", "TVS DIODE 12V/7V 26V/12V SOT23-3", Manufacturer="Semtech Corporation", Operating Temperature="-40°C ~ +85°C", Package Description="SOT23, 3-Leads, Body 2.9x1.3mm, Pitch 0.95mm, Lead Span 2.5mm, IPC Medium Density", ValueBOM="TVS диод SM712.TCT \"STMicroelectronics\" 	SO23-3", Voltage="-7 В - 12 В", ComponentLink2Description="Manufacturer Link", ComponentLink2URL=https://www.semtech.com/, ComponentLink3Description=Datasheet, ComponentLink3URL=https://www.semtech.com/uploads/documents/sm712.pdf, ManufacturerPartNumber=SM712.TCT, Marking=712, Modify="23.02.2019 13:32:50", PartNumber="SM712.TCT_Semtech Corporation", Supplier=Digi-Key, Supplier P/N=SM712CT-ND, Автор="Ткаченко М.", Количество1=1, Количество2=500, Разрешен к применению=True, Цена1=1,8, Цена2=1,05
VD? VD?: library part "PMEG4030EP_NXP Semiconductors", "DIODE SCHOTTKY 40V 3A SOD128", Current="3 А", Manufacturer="NXP Semiconductors", Operating Temperature="-55°C ~ +150°C", Package Description="SODFL, 2-Leads, Body 2,50x4,70mm, IPC Low Density", ValueBOM="Диод PMEG4030EP \"NXP Semiconductors\"", Voltage="40 В", ComponentLink2Description="Manufacturer Link", ComponentLink2URL=http://www.nxp.com/, ComponentLink3Description=Datasheet, ComponentLink3URL=http://www.nxp.com/documents/data_sheet/PMEG4030EP.pdf, ManufacturerPartNumber=PMEG4030EP, Marking=AE, Modify="12.08.2015 14:32:16", PartNumber="PMEG4030EP_NXP Semiconductors", Supplier=Digi-Key, Supplier P/N=568-7407-1-ND, Автор="Хоменко С.П.", Количество1=10, Количество2=25, Разрешен к применению=True, Цена1=0,371, Цена2=0,3248
XP? XP?: library part PLS2-2_CONNFLY, Manufacturer=CONNFLY, Operating Temperature="-40°C ~ +100°C", ValueBOM="Вилка  PLS2-2 \"CONNFLY\"", ComponentLink2Description="Manufacturer Link", ComponentLink2URL=http://www.connfly.com/, ComponentLink3Description=Datasheet, ComponentLink3URL=http://www.platan.ru/pdf/datasheets/xn/113.pdf, ManufacturerPartNumber=PLS2-2, Modify="01.06.2016 11:25:57", Net_Name1=Term, Net_Name2=Term, PartNumber=PLS2-2_CONNFLY, Количество1=1, Количество2=10, Разрешен к применению=True, Цена1=0, Цена2=0
XT? XT?: library part PAD1.3x0.8_Контактмодуль, "отверстие сигнальных цепей", Manufacturer=Контактмодуль, ManufacturerPartNumber=PAD1.3x0.8, Package Description=111, ComponentLink2Description="Manufacturer Link", ComponentLink3Description=Datasheet, Modify="15.02.2016 15:20:49", PartNumber=PAD1.3x0.8_Контактмодуль, Автор="Ткаченко М.", Количество1=0, Количество2=0, Разрешен к применению=True, Цена1=0, Цена2=0
ZQ?: library part "ABM3-8.000MHZ-D2Y-T_Abracon LLC", "8MHz ±20ppm Crystal 18pF 140 Ohm -40°C ~ 85°C Surface Mount 2-SMD", Manufacturer="Abracon LLC", Operating Temperature="-40°C ~ +85°C", Package Description="MINIATURE CERAMIC SMD CRYSTAL 5x3.2 mm", Tolerance=±20ppm, ValueBOM="Резонатор кварцевый ABM3-8.000MHZ-D2Y-T \"Abracon LLC\"", ComponentLink2Description="Manufacturer Link", ComponentLink2URL=http://www.abracon.com, ComponentLink3Description=Datasheet, ComponentLink3URL=http://www.abracon.com/Resonators/abm3.pdf, ManufacturerPartNumber=ABM3-8.000MHZ-D2Y-T, Modify=20.01.2016, PartNumber="ABM3-8.000MHZ-D2Y-T_Abracon LLC", Supplier=Digi-Key, Supplier P/N=535-10630-1-ND, Автор="Хоменко С.П.", Количество1=1, Количество2=10, Разрешен к применению=True, Цена1=0,69, Цена2=0,579

## Nets (pads, with @x,y where several pads share a name; then routed paths per layer and width w, separated by ;. In a path a pad name is that pad's centre, name@x,y a point inside that pad or via, vN(x,y) a via of type N, cw(c..) or ccw(c..) an arc to the next point about the centre after c; other vN are vias at no path point)
"+3,3 В": C?.1@213,60.075 C?.1@218.15,62 C?.1@662.15,62 DA?.2@238.125,61.05 L?.2@471,62 L?.2@558,62
"+5 В": C?.1@224.15,62 C?.1@245.1,62 C?.1@327.15,62 DA?.3@240,62 L?.2@296.5,58 L?.2@353,62 R?.2@261.85,62
"+5 В_422": C?.1@502.15,62 C?.1@622.15,62 C?.1@656.15,62 C?.2@589.85,62 DA?.5@595,62.075 L?.2@552,62
"+5 В_CAN": C?.1@427.15,62 C?_1.1@169,77.15 C?_1.1@215,77.15 C?_2.1@169,93.15 C?_2.1@218,93.15 DD?_1.3 DD?_1.5 DD?_2.3 DD?_2.5 L?.2@453,62
"+12 В": L?.1@333,60 L?.1@434,60 L?.1@533,60 R?.2@301.85,62 VD?.2@273,61.5 XT?.1@265,62
BOOT1: 
BOOT1-Rasp: DA?.1@594.35,59.925
CAN1_RX_MCU: 
CAN1_TX_MCU: 
CAN2_RX_MCU: 
CAN2_TX_MCU: 
CAN_H_1: C?_1.1@192,77.15 L?_1.4
CAN_H_2: C?_2.1@194,93.15 L?_2.4
CAN_L_1: C?_1.1@200,77.15 L?_1.3
CAN_L_2: C?_2.1@202,93.15 L?_2.3
FW_RX_A: R?.1@682.15,62 VD?.1@675.125,62.95 XP?.1@649,60
FW_RX_B: R?.1@668.15,62 R?.2@638.7,62 VD?.2@675.125,61.05
FW_TX_A: R?.1@616.15,62 R?.2@603.7,62 VD?.2@628.125,61.05
FW_TX_B: R?.1@642.15,62 VD?.1@628.125,62.95 XP?.1@609,60
GND: C?_1.2 C?_2.2 DD?_1.2 DD?_2.2 R?_1.1 R?_2.1
GND_1: C?.1@458.2,62 C?.1@514.15,62 C?.1@563.15,62 C?.1@569.15,62 C?.1@581.15,62 C?.2@213,61.925 C?.2@219.85,62 C?.2@225.85,62 C?.2@315.85,62 C?.2@322.45,62 C?.2@328.85,62 C?.2@359.85,62 C?.2@365.85,62 C?.2@371.85,62 C?.2@377.85,62 C?.2@383.85,62 C?.2@389.85,62 C?.2@395.85,62 C?.2@402.85,62 C?.2@465.85,62 C?.2@509.8,62 C?.2@521.85,62 C?.2@527.85,62 C?.2@663.85,62 DA?.1@238.125,62.95 R?.2@176.85,62 R?.2@476.85,62 U?.5@341,56.16
GND_422: C?.1@588.15,62 C?.2@490.85,62 C?.2@497.45,62 C?.2@503.85,62 C?.2@623.85,62 C?.2@657.85,62 DA?.2@595,59.925 U?.5@540,56.16 VD?.3
GND_can: C?.2@415.85,62 C?.2@422.45,62 C?.2@428.85,62 U?.5@441,56.16
GND_ext: C?.2@201.85,62 C?.2@248.75,62 C?.2@255.45,62 C?.2@309.45,62 C?.2@409.45,62 C?.2@484.45,62 DA?.3@282.635,55.2 DA?.7 R?.1@175.15,62 R?.1@181.15,62 R?.1@194.15,62 U?.2 VD?.2@188,61.5 VD?.2@233,55.5 XT?.1@169,62
NetC?_1: C?.1@252.55,62 DA?.8 R?.1@300.15,62 VD?.1@233,60.5 VD?.1@273,56.5
NetC?_1: C?.1@306.55,62 L?.2@333,62 U?.1@341,46
NetC?_1: C?.1@406.55,62 L?.2@434,62 U?.1@441,46
NetC?_1: C?.1@481.55,62 L?.2@533,62 U?.1@540,46
NetC?_1: C?.1@200.15,62 C?.1@206.15,62 DA?.4@283.905,55.2
NetC?_1: C?.1@314.15,62 C?.1@319.55,62 L?.1@353,60 U?.7@341,61.24
NetC?_1: C?.1@414.15,62 C?.1@419.55,62 L?.1@453,60 U?.7@441,61.24
NetC?_1: C?.1@489.15,62 C?.1@494.55,62 L?.1@552,60 U?.7@540,61.24
NetC?_1: C?.1@520.15,62 C?.1@526.15,62 L?.1@558,60
NetC?_1: C?.1@464.15,62 C?.2@459.8,62
NetC?_1: C?.1@358.15,62 C?.1@364.15,62 C?.1@370.15,62 C?.1@376.15,62 C?.1@382.15,62 C?.1@388.15,62 C?.1@394.15,62 C?.1@401.15,62 L?.1@471,60
NetC?_1: C?.1@508.2,62 C?.2@515.85,62
NetC?_1_1: C?_1.1@185,77.15 DD?_1.6 L?_1.2
NetC?_1_1: C?_1.1@177,77.15 DD?_1.7 L?_1.1
NetC?_2: C?.2@207.85,62 R?.2@182.85,62
NetC?_2: C?.2@582.85,62 ZQ?.2
NetC?_2: C?.2@570.85,62 ZQ?.1
NetC?_2_1: C?_2.1@186,93.15 DD?_2.6 L?_2.2
NetC?_2_1: C?_2.1@178,93.15 DD?_2.7 L?_2.1
NetDA?_1: DA?.1@280.095,55.2 L?.1@287.5,58 VD?.1@188,56.5
NetDA?_5: DA?.5@283.905,60.8 R?.1@260.15,62 R?.2@195.85,62
NetDD?_1: 
NetDD?_1_1: DD?_1.1
NetDD?_1_4: DD?_1.4
NetDD?_1_8: DD?_1.8 R?_1.2
NetDD?_2_1: DD?_2.1
NetDD?_2_4: DD?_2.4
NetDD?_2_8: DD?_2.8 R?_2.2
NetDD?_4: 
NetDD?_6: R?.2@617.85,62
NetDD?_7: R?.2@643.85,62
NetDD?_8: R?.2@669.85,62
NetDD?_9: R?.2@683.85,62
NetDD?_94: R?.1@475.15,62
NetR?_1: R?.1@600.4,62 XP?.2@611,60
NRST: C?.2@564.85,62 XP?.2@651,60
NRST-Rasp: DA?.3@595.65,59.925
SWCLK: 
SWDIO: 
USART1_RX: 
USART1_TX: 
pads on no net: DA?.2@281.365,55.2 DA?.4@595.65,62.075 DA?.6 DA?.p R?.1@635.4,62 U?.6 VD?.p